# Allegro board ti_foc_motor.brd
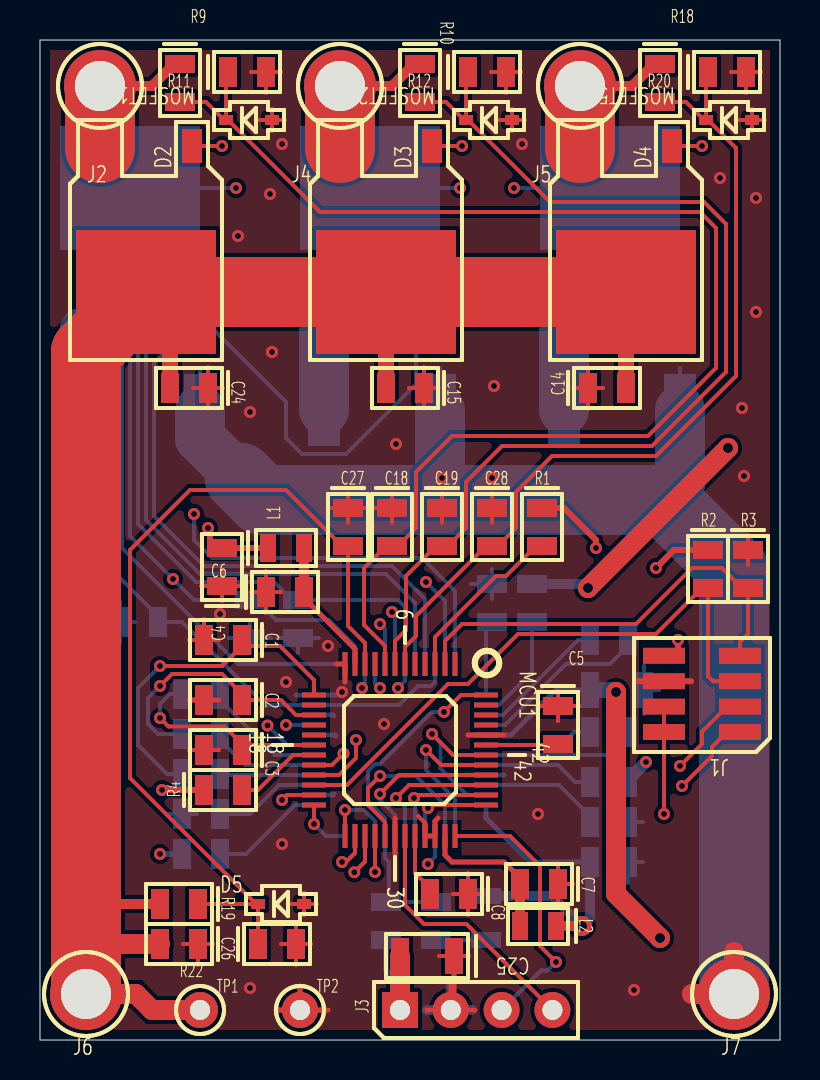
[diagram p0: board, top side]
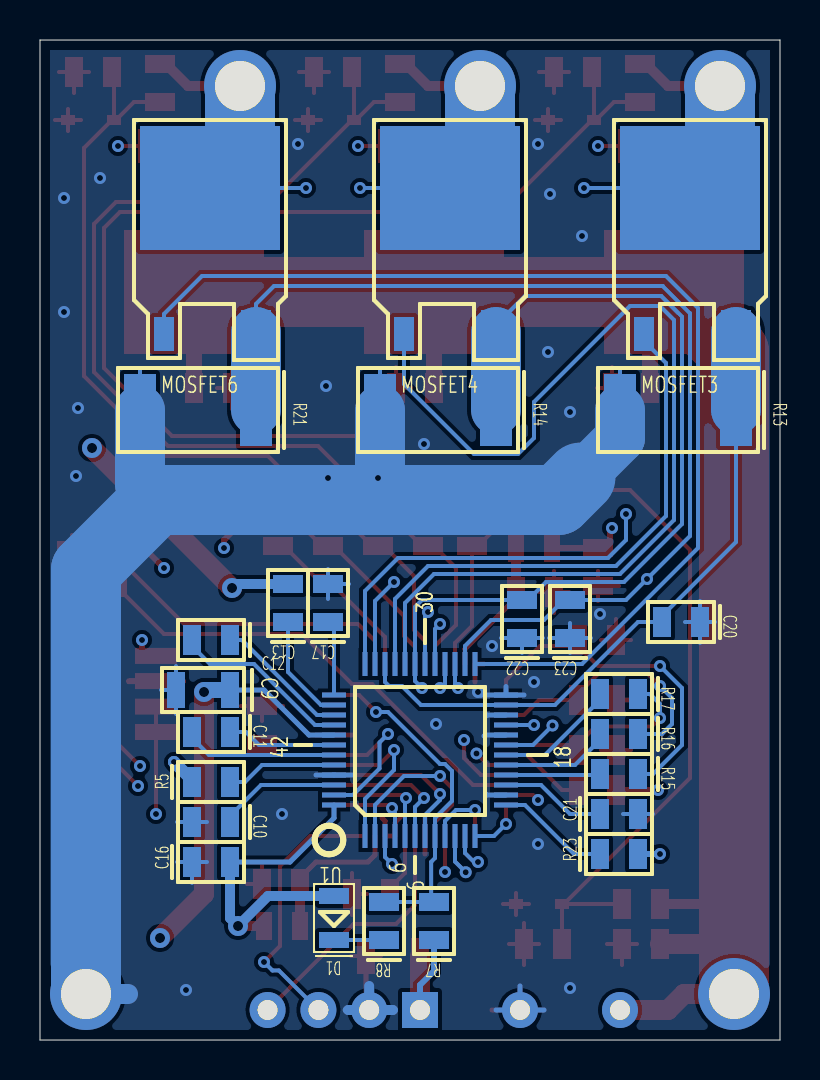
[diagram p1: board, bottom side, seen from below]

Outline 37 x 50 mm; copper layers: TOP, POWER, GND, BOTTOM. Coordinates in mm from the lower left corner of the outline.
Outline path: 0,50 0,0 37,0 37,50 0,50

## Design rules (mm)
constraint set DEFAULT: 

## Placement (name value [footprint] x y rotation side)
C1  2.2nF  [SMD_C_0805]  10.1 20 270 top
C2  2.2nF  [SMD_C_0805]  10.1 17 270 top
C3  2.2nF  [SMD_C_0805]  10.1 14.5 270 top
C4  2.2uF  [SMD_C_0805]  9.1 22.7 180 top
C5  2.2uF  [SMD_C_0805]  25.9 16.7 0 top
C6  2.2uF  [SMD_C_0805]  11.3 22.4 90 top
C7  2.2uF  [SMD_C_0805]  25.9 7.8 270 top
C8  2.2uF  [SMD_C_0805]  21.4 7.3 270 top
C9  4.7uF  [SMD_C_1206]  27.5 17.5 270 bottom
C10  1uF  [SMD_C_0805]  27.5 10.9 270 bottom
C11  47nF  [SMD_C_0805]  27.5 15.4 270 bottom
C12  47nF  [SMD_C_0805]  27.5 20 270 bottom
C13  2.2uF  [SMD_C_0805]  24.6 20.9 0 bottom
C14  1uF  [SMD_C_0805]  27.4 32.6 90 top
C15  1uF  [SMD_C_0805]  19.2 32.6 270 top
C16  1uF  [SMD_C_0805]  29.4 8.9 90 bottom
C17  1uF  [SMD_C_0805]  22.6 20.9 0 bottom
C18  0.1uF  [SMD_C_0805]  17.6 26.6 0 top
C19  0.1uF  [SMD_C_0805]  20.1 26.6 0 top
C20  1nF  [SMD_C_0805]  4 20.9 270 bottom
C21  1uF  [SMD_C_0805]  9 11.3 90 bottom
C22  1nF  [SMD_C_0805]  12.9 20.1 0 bottom
C23  1nF  [SMD_C_0805]  10.5 20.1 0 bottom
C24  1uF  [SMD_C_0805]  8.4 32.6 270 top
C25  47uF  [SMD_C_1206]  20.7 4.2 270 top
C26  0.1uF  [SMD_C_0805]  7.9 4.8 270 top
C27  0.1uF  [SMD_C_0805]  15.4 26.6 0 top
C28  0.1uF  [SMD_C_0805]  22.6 26.6 0 top
D1  RED  [SMD_D_0805]  22.3 5.1 0 bottom
D2  3.3V  [SOD323]  9.3 46 90 top
D3  3.3V  [SOD323]  21.3 46 90 top
D4  3.3V  [SOD323]  33.3 46 90 top
D5  3.3V  [SOD323]  10.9 6.8 90 top
J1  JTAG  [C2X4_SMD_1P27]  35 15.4 180 top
J2  motor_A  [BANANA_SMALL]  3 47.7 0 top
J3  Conn1X4  [CONN1X4]  18 1.5 90 top
J4  motor_B  [BANANA_SMALL]  15 47.7 0 top
J5  motor_C  [BANANA_SMALL]  27 47.7 0 top
J6  power_P  [BANANA_SMALL]  2.3 2.3 0 top
J7  power_GND  [BANANA_SMALL]  34.7 2.3 0 top
L1  bead  [SMD_L_0805]  11.4 24.6 90 top
L2  bead  [SMD_L_0805]  25.8 5.7 270 top
MCU1  TMS320F28027  [LQFP48_MCU]  18 14.5 270 top
MOSFET1  IRLR7843-TO252AA  [TO252AA_ZK]  5.3 37 180 top
MOSFET2  IRLR7843-TO252AA  [TO252AA_ZK]  17.3 37 180 top
MOSFET3  IRLR7843-TO252AA  [TO252AA_ZK]  4.5 43 180 bottom
MOSFET4  IRLR7843-TO252AA  [TO252AA_ZK]  16.5 43 180 bottom
MOSFET5  IRLR7843-TO252AA  [TO252AA_ZK]  29.3 37 180 top
MOSFET6  IRLR7843-TO252AA  [TO252AA_ZK]  28.5 43 180 bottom
R1  2.2K  [SMD_R_0805]  25.1 26.6 0 top
R2  1K  [SMD_R_0805]  33.4 24.5 0 top
R3  2.2K  [SMD_R_0805]  35.4 24.5 0 top
R4  1K  [SMD_R_0805]  8.2 12.5 90 top
R5  100R  [SMD_R_0805]  29.4 12.9 90 bottom
R7  10K  [SMD_R_0805]  17.3 5 0 bottom
R8  330R  [SMD_R_0805]  19.8 5 0 bottom
R9  62K  [SMD_R_0805]  7 48.8 0 top
R10  62K  [SMD_R_0805]  19 48.8 0 top
R11  5K  [SMD_R_0805]  9.4 48.4 90 top
R12  5K  [SMD_R_0805]  21.4 48.4 90 top
R13  0.007R  [SMD_R_2512]  2.2 31.5 270 bottom
R14  0.007R  [SMD_R_2512]  14.2 31.5 270 bottom
R15  56R  [SMD_R_0805]  7.1 13.3 270 bottom
R16  56R  [SMD_R_0805]  7.1 15.3 270 bottom
R17  56R  [SMD_R_0805]  7.1 17.3 270 bottom
R18  62K  [SMD_R_0805]  31 48.8 0 top
R19  62K  [SMD_R_0805]  7.9 6.8 270 top
R20  5K  [SMD_R_0805]  33.4 48.4 90 top
R21  0.007R  [SMD_R_2512]  26.2 31.5 270 bottom
R22  5K  [SMD_R_0805]  10.9 4.8 90 top
R23  10K  [SMD_R_0805]  9 9.3 90 bottom
TP1  CAP_P  [TESTPAD_CIR_10]  8 1.5 0 top
TP2  CAP_N  [TESTPAD_CIR_10]  13 1.5 0 top
U1  DRV8305N  [HTQFP48]  18 14.5 90 bottom

## Library data of the parts
C1-C28 = CAP NP
D1 = LED
D2-D5 = DIODE TVS
J1 = C2X4
J2 J4-J7 = Banana
J3 = C1X4Gen
L1 L2 = INDUCTOR
MCU1 = TMS320F28027PT
MOSFET1-MOSFET6 = N_MOSFET_TO252-263
R1-R5 R7-R23 = RESISTOR
TP1 TP2 = TestPad
U1 = DRV8305_0

## Footprints (pads in the part's own frame, mm; a bottom-side part is the same pattern mirrored in y, then rotated)
BANANA_SMALL
  round 3.6 hole 2.5: 1(0,0)
C2X4_SMD_1P27
  rect 2.1x0.8 smd: 1(0,0) 2(0,-1.27) 3(0,-2.54) 4(0,-3.81) 5(3.8,-3.81) 6(3.8,-2.54) 7(3.8,-1.27) 8(3.8,0)
CONN1X4
  rect 1.8x1.8 hole 1: 1(0,0)
  round 1.8 hole 1: 2(0,-2.54) 3(0,-5.08) 4(0,-7.62)
HTQFP48
  rect 1.2x0.25 smd: 1(-4.3,2.75) 2(-4.3,2.25) 3(-4.3,1.75) 4(-4.3,1.25) 5(-4.3,0.75) 6(-4.3,0.25) 7(-4.3,-0.25) 8(-4.3,-0.75) 9(-4.3,-1.25) 10(-4.3,-1.75) 11(-4.3,-2.25) 12(-4.3,-2.75) 25(4.3,-2.75) 26(4.3,-2.25) 27(4.3,-1.75) 28(4.3,-1.25) 29(4.3,-0.75) 30(4.3,-0.25) 31(4.3,0.25) 32(4.3,0.75) 33(4.3,1.25) 34(4.3,1.75) 35(4.3,2.25) 36(4.3,2.75)
  rect 0.25x1.2 smd: 13(-2.75,-4.3) 14(-2.25,-4.3) 15(-1.75,-4.3) 16(-1.25,-4.3) 17(-0.75,-4.3) 18(-0.25,-4.3) 19(0.25,-4.3) 20(0.75,-4.3) 21(1.25,-4.3) 22(1.75,-4.3) 23(2.25,-4.3) 24(2.75,-4.3) 37(2.75,4.3) 38(2.25,4.3) 39(1.75,4.3) 40(1.25,4.3) 41(0.75,4.3) 42(0.25,4.3) 43(-0.25,4.3) 44(-0.75,4.3) 45(-1.25,4.3) 46(-1.75,4.3) 47(-2.25,4.3) 48(-2.75,4.3)
LQFP48_MCU
  rect 1.2x0.25 smd: 1(-4.3,2.75) 2(-4.3,2.25) 3(-4.3,1.75) 4(-4.3,1.25) 5(-4.3,0.75) 6(-4.3,0.25) 7(-4.3,-0.25) 8(-4.3,-0.75) 9(-4.3,-1.25) 10(-4.3,-1.75) 11(-4.3,-2.25) 12(-4.3,-2.75) 25(4.3,-2.75) 26(4.3,-2.25) 27(4.3,-1.75) 28(4.3,-1.25) 29(4.3,-0.75) 30(4.3,-0.25) 31(4.3,0.25) 32(4.3,0.75) 33(4.3,1.25) 34(4.3,1.75) 35(4.3,2.25) 36(4.3,2.75)
  rect 0.25x1.2 smd: 13(-2.75,-4.3) 14(-2.25,-4.3) 15(-1.75,-4.3) 16(-1.25,-4.3) 17(-0.75,-4.3) 18(-0.25,-4.3) 19(0.25,-4.3) 20(0.75,-4.3) 21(1.25,-4.3) 22(1.75,-4.3) 23(2.25,-4.3) 24(2.75,-4.3) 37(2.75,4.3) 38(2.25,4.3) 39(1.75,4.3) 40(1.25,4.3) 41(0.75,4.3) 42(0.25,4.3) 43(-0.25,4.3) 44(-0.75,4.3) 45(-1.25,4.3) 46(-1.75,4.3) 47(-2.25,4.3) 48(-2.75,4.3)
SMD_C_0805
  rect 1.5x0.9 smd: 1(0,0) 2(0,-1.9)
SMD_C_1206
  rect 1.8x0.9 smd: 1(0,0) 2(0,-2.7)
SMD_D_0805
  rect 1.5x0.8 smd: 1(0,0.1) 2(0,-2.1)
SMD_L_0805
  rect 1.4x0.8 smd: 1(0,0) 2(0,-1.8)
SMD_R_0805
  rect 1.5x0.9 smd: 1(0,0) 2(0,-1.9)
SMD_R_2512
  rect 3.6x1.6 smd: 1(0,0) 2(0,-5.8)
SOD323
  rect 0.5x0.7 smd: 1(0,0) 2(0,-2.3)
TESTPAD_CIR_10
  round 1.8 hole 1: 1(0,0)
TO252AA_ZK
  rect 1x1.7 smd: 1(-2.3,-7.7)
  rect 1.5x2.2 smd: 3(2.3,-7.6)
  rect 7x6.2 smd: 4(0,-0.4)

## Nets
3.3V: C4.2 C16.2 C25.2 D1.2 J1.5 J3.1 L1.1 L2.1 R1.1 R2.1 R4.1 R7.1 R23.2 U1.48
GND: C1.2 C2.2 C3.2 C4.1 C5.1 C6.1 C7.1 C8.1 C9.2 C10.2 C14.1 C15.1 C16.1 C17.2 C18.1 C19.1 C20.1 C21.2 C22.1 C23.1 C24.1 C25.1 C26.1 C27.1 C28.1 D2.2 D3.2 D4.2 D5.2 J1.6 J3.2 J7.1 MCU1.12 MCU1.30 MCU1.33 MCU1.34 MCU1.44 R3.1 R11.2 R12.2 R13.2 R14.2 R20.2 R21.2 R22.2 TP2.1(T) U1.14 U1.20 U1.22 U1.24 U1.45
PVDD: C9.1 C13.2 C14.2 C15.2 C24.2 C26.2 J6.1 MOSFET1.4 MOSFET2.4 MOSFET5.4 R5.1 R19.2 TP1.1(T) U1.41
GH_A: MOSFET1.1 U1.36
GH_B: MOSFET2.1 U1.29
GH_C: MOSFET5.1 U1.28
GL_A: MOSFET3.1 U1.33
GL_B: MOSFET4.1 U1.32
GL_C: MOSFET6.1 U1.25
MCU_EN_GATE: MCU1.41 U1.1
MCU_IIC_SCK: J3.3 MCU1.36
MCU_IIC_SDA: J3.4 MCU1.31
MCU_INH_A: MCU1.29 U1.2
MCU_INH_B: MCU1.37 U1.4
MCU_INH_C: MCU1.39 U1.6
MCU_INL_A: MCU1.28 U1.3
MCU_INL_B: MCU1.38 U1.5
MCU_INL_C: MCU1.40 U1.7
MCU_ISEN_A: C1.1 MCU1.13 R15.1
MCU_ISEN_B: C2.1 MCU1.15 R16.1
MCU_ISEN_C: C3.1 MCU1.18 R17.1
MCU_NFAULT: MCU1.48 R7.2 R8.2 U1.8
MCU_SPI_CS: MCU1.25 U1.9
MCU_SPI_MISO: MCU1.26 U1.11
MCU_SPI_MOSI: MCU1.27 U1.10
MCU_SPI_SCK: MCU1.24 U1.12
MCU_VSEN_A: C18.2 D2.1(CATHODE) MCU1.8 R9.2 R11.1
MCU_VSEN_B: C19.2 D3.1(CATHODE) MCU1.7 R10.2 R12.1
MCU_VSEN_C: C28.2 D4.1(CATHODE) MCU1.6 R18.2 R20.1
MCU_VSEN_PVDD: C27.2 D5.1(CATHODE) MCU1.10 R19.1 R22.1
MCU_WAKE: MCU1.42 U1.47(WAKE)
SH_A: J2.1 MOSFET1.3(S) MOSFET3.4 R9.1 U1.35
SH_B: J4.1 MOSFET2.3(S) MOSFET4.4 R10.1 U1.30
SH_C: J5.1 MOSFET5.3(S) MOSFET6.4 R18.1 U1.27
SL_A: C20.2 MOSFET3.3(S) R13.1 U1.23 U1.34
SL_B: C22.2 MOSFET4.3(S) R14.1 U1.21 U1.31
SL_C: C23.2 MOSFET6.3(S) R21.1 U1.19 U1.26
TCK: J1.7 J1.8 MCU1.23
TDI: J1.1 MCU1.20
TDO: J1.3 MCU1.22 R2.2
TMS: J1.2 MCU1.21
TRST: J1.4 MCU1.2 R3.2
N01800: D1.1(CATHODE) R8.1
N02208: C21.1 U1.15
N02325: R15.2 U1.16
N02329: R16.2 U1.17
N02333: R17.2 U1.18
N03801: C17.1 U1.37
N03912: C13.1 U1.38
N04769: C11.1 U1.42
N04773: C11.2 U1.43
N04796: C12.1 U1.39
N04800: C12.2 U1.40
N04838: R5.2 U1.44
N04994: C10.1 U1.46
N3758007: C6.2 L1.2 MCU1.11
N3759669: C7.2 L2.2 MCU1.35
N3759821: C5.2 MCU1.43
N3759959: C8.2 MCU1.32
N3828127: MCU1.19 R4.2
N3830827: MCU1.3(X\R\S\) R1.2
N3830915: R23.1 U1.13

Pads without a net: MCU1 1 4 5 9 14 16 17 45 46 47

## Via types
v1: diameter 0.6, hole 0.3, TOP to BOTTOM, 71 vias
v2: diameter 1, hole 0.5, TOP to BOTTOM, 5 vias

## Routing (per net, layer and track width the routed paths; a pad name or vN(x,y) marks a point on that pad's centre or on a via; arc(x,y) is an arc through that point)
3.3V: length 42
  TOP w0.3: R1.1 26.2,26.6 27.8,25 v1(27.8,24.6) ; J1.5 31.6,19.21 31.9,19.51 v1(31.9,20) ; R4.1 v1(6.1,12.5) ; R2.1 31.7,24.5 v1(30.8,23.6) ; L1.1 C4.2 8.8,24.6 8.5,24.9 8.5,25.5 v1(8.4,25.6)
  TOP w0.5: L2.1 v2(27.1,5.7)
  TOP w1: C25.2 J3.1
  POWER w0.2: 19.19,1.5 19.2,1.5
  POWER w0.5: J3.1 16.8,1.5 ; J3.1 19.19,1.5 ; J3.1 18,2.7
  BOTTOM w0.25: U1.48 22.3,11.1 24.5,8.9 C16.2
  BOTTOM w0.3: R23.2 v1(6,9.3) ; J3.1 18,2.75 17.3,3.45 R7.1
  BOTTOM w0.5: C16.2 27.5,6.1 v2(27.1,5.7) 25.6,7.2 D1.2
GND: length 217.7
  TOP w0.2: C4.1 9.1,23.45 ; C4.1 9.1,21.95 ; C4.1 8.05,22.7 ; C4.1 10.15,22.7 ; 35.4,23.75 R3.1 35.4,25.25 ; 25.9,15.95 C5.1 ; C5.1 26.95,16.7 ; C5.1 25.9,17.45 ; C5.1 24.85,16.7 ; D2.2 12.25,46 ; D2.2 11.6,45.45 ; D2.2 11.6,46.55 ; D2.2 10.95,46 ; R11.2 12.05,48.4 ; R11.2 11.3,47.35 ; R11.2 10.55,48.4 ; 8.95,14.5 C3.2 7.45,14.5 ; 22.95,46 D3.2 ; D3.2 23.6,46.55 ; D3.2 24.25,46 ; D3.2 23.6,45.45 ; 27.4,31.55 C14.1 ; C14.1 28.15,32.6 ; C14.1 26.65,32.6 ; C14.1 27.4,33.65 ; C15.1 19.95,32.6 ; C15.1 19.2,31.55 ; C15.1 18.45,32.6 ; C15.1 19.2,33.65 ; 12.05,4.8 R22.2 ; R22.2 12.8,5.85 ; R22.2 13.55,4.8 ; R22.2 12.8,3.75 ; 7.15,4.8 C26.1 ; C26.1 7.9,3.75 ; C26.1 8.65,4.8 ; R20.2 36.05,48.4 ; R20.2 34.55,48.4 ; R20.2 35.3,47.35 ; C27.1 15.4,27.35 ; C27.1 14.35,26.6 ; C27.1 15.4,25.85 ; C27.1 16.45,26.6 ; D4.2 35.6,46.55 ; D4.2 35.6,45.45 ; D4.2 36.25,46 ; D4.2 34.95,46 ; C6.1 12.05,22.4 ; C6.1 10.55,22.4 ; C6.1 11.3,21.35 ; C6.1 11.3,23.45 ; 23.3,47.35 R12.2 ; R12.2 24.05,48.4 ; R12.2 22.55,48.4 ; 8.4,31.55 C24.1 ; C24.1 7.65,32.6 ; C24.1 8.4,33.65 ; C24.1 9.15,32.6 ; 16.55,26.6 C18.1 ; C18.1 17.6,27.35 ; C18.1 17.6,25.85 ; 20.1,25.85 C19.1 20.1,27.35 ; 18.9,11.2 19.25,10.85 ; D5.2 13.2,7.35 ; D5.2 13.85,6.8 ; D5.2 12.55,6.8 ; D5.2 13.2,6.25 ; C8.1 21.4,8.35 ; C8.1 21.4,6.25 ; C8.1 22.15,7.3 ; C8.1 20.65,7.3 ; C1.2 8.2,21.05 ; C1.2 8.95,20 ; C1.2 7.45,20 ; 21.45,4.2 C25.1 19.95,4.2 ; 22.6,25.85 C28.1 22.6,27.35 ; 25.9,6.75 C7.1 ; C7.1 26.65,7.8 ; C7.1 25.9,8.85
  TOP w0.25: 15.25,17.9 MCU1.12 14.82,18.8 ; 19.9,11.1 19.75,10.95 MCU1.34 MCU1.33 19.25,10.85 ; C25.1 20.7,1.66 J3.2 ; 21.4,15.25 MCU1.44 23.2,15.25 ; TP2.1 13,2.7 ; TP2.1 14.4,1.5 ; TP2.1 11.8,1.5 ; 17.75,11.1 MCU1.30 17.75,9.3 ; 7.45,17 C2.2 8.95,17 ; J3.2 19.35,1.5 ; J3.2 21.74,1.5 ; J3.2 20.54,2.7
  TOP w0.3: 32.55,17.94 J1.6 29.85,17.94
  TOP w1: 32.6,2.3 J7.1 34.7,4.4
  GND w0.25: 14.3,1.5 TP2.1 ; J3.2 19.34,1.5 ; J3.2 21.74,1.5 ; J3.2 20.54,2.7 ; TP2.1 13,2.7 ; TP2.1 11.8,1.5
  GND w1: 34.7,4.4 J7.1 32.5,2.3
  BOTTOM w0.2: 22.6,22.05 C17.2 ; C17.2 21.55,22.8 ; C17.2 22.6,23.55 ; 30.15,10.9 C10.2 28.65,10.9 ; C20.1 4,21.95 ; C20.1 4,19.85 ; C20.1 4.75,20.9 ; C20.1 3.25,20.9 ; 7.85,11.3 C21.2 6.35,11.3 ; 9.45,20.1 C23.1 ; C23.1 10.5,19.35 ; C23.1 11.55,20.1 ; C23.1 10.5,20.85 ; 6.9,31.5 R13.2 ; R13.2 8,33.6 ; R13.2 9.1,31.5 ; 28.65,8.9 C16.1 ; C16.1 29.4,7.85 ; C16.1 30.15,8.9 ; R14.2 21.1,31.5 ; R14.2 20,33.6 ; R14.2 18.9,31.5 ; C9.2 30.95,17.5 ; C9.2 30.2,16.3 ; C9.2 30.2,18.7 ; 11.85,20.1 C22.1 ; C22.1 12.9,19.35 ; C22.1 13.95,20.1 ; 30.9,31.5 R21.2 ; R21.2 33.1,31.5 ; R21.2 32,33.6
  BOTTOM w0.25: U1.20 14.75,15.25 14.8,15.2 ; U1.14 14.65,12.25 14.7,12.3 ; U1.24 12.8,17.25 ; U1.24 14.95,17.25 v1(15.1,17.4) ; U1.24 13.7,17.68 ; TP2.1 14.2,1.5 ; TP2.1 11.8,1.5 ; TP2.1 13,2.7 ; 14.7,16.2 14.65,16.25 U1.22 ; 21.74,1.5 21.6,1.5 ; 21.4,13.25 U1.45 23.2,13.25
  BOTTOM w0.5: 21.6,1.5 J3.2 ; J3.2 19.35,1.5 ; J3.2 20.54,2.7
  BOTTOM w1: J7.1 32.6,2.3
  BOTTOM w2.5: 31.2,27 32,27.8 R21.2 ; 20,27 R14.2 ; R13.2 8,30.1 9.8,28.3
  BOTTOM w3.5: J7.1 34.7,23.5 31.2,27 11.1,27 9.98,28.12
  vias: v1(9,21.3) v1(9.9,40.2) v1(10.5,31.4) v1(10.5,2.6) v1(11.5,42.3) v1(11.6,34.4) v1(12.1,44.8) v1(12.1,9.8) v1(12.3,17.9) v1(14.4,19.7) v1(17.2,15.8) v1(17.8,29.8) v1(20.1,28.1) v1(22.6,28.1) v1(22.7,32.7) v1(24.1,44.8) v1(24.9,11.3) v1(29.7,2.5) v1(34,43.1) v1(35.1,31.6) v1(35.2,28.2) v1(35.8,42.1) v1(35.8,36.4)
PVDD: length 130.1
  TOP w0.5: R19.2 2.3,6.8
  TOP w0.8: MOSFET1.4 6.5,36.2 C24.2 ; C15.2 MOSFET2.4 ; C14.2 MOSFET5.4
  TOP w1: v2(28.8,17.4) 28.8,7.3 v2(31,5.1) ; J6.1 4.8,2.3 5.6,1.5 TP1.1 ; C26.2 2.3,4.8 ; v2(27.4,22.6) v2(34.4,29.6)
  TOP w3.5: J6.1 2.3,34.4 MOSFET1.4 MOSFET2.4 MOSFET5.4
  POWER w0.2: 4.4,2.3 J6.1 2.3,4.4
  POWER w0.5: 9.2,1.5 TP1.1 8,2.7
  BOTTOM w0.25: U1.41 23.55,15.25 25.8,17.5 C9.1
  BOTTOM w0.5: v2(27.4,22.6) 27.2,22.8 C13.2
  BOTTOM w0.6: v1(30.3,13.9) 29.4,13 R5.1
  BOTTOM w0.8: C9.1 28.7,17.5 v2(28.8,17.4)
GH_A: length 39.5
  TOP w0.2: v1(9.1,44.7) MOSFET1.1
  POWER w0.2: v1(7.7,26.3) 7.7,43.3 v1(9.1,44.7)
  BOTTOM w0.2: v1(7.7,26.3) 7.7,25 8.6,24.1 19.1,24.1 20.75,22.45 U1.36
GH_B: length 30.7
  TOP w0.2: v1(21.1,44.7) MOSFET2.1
  POWER w0.2: v1(21.1,44.7) 21.7,44.1 21.7,23.8 18.7,20.8 v1(17,20.8)
  BOTTOM w0.2: v1(17,20.8) 17.25,20.55 U1.29
GH_C: length 36.6
  TOP w0.2: v1(33.1,44.7) MOSFET5.1
  POWER w0.2: v1(33.1,44.7) 33.1,33.7 v1(17,17.6)
  BOTTOM w0.2: v1(17,17.6) 16.95,17.6 16.75,17.8 U1.28
GL_A: length 28.1
  BOTTOM w0.2: U1.33 19.25,22.05 17.6,23.7 8.2,23.7 5.7,26.2 5.7,33.85 6.8,34.95 MOSFET3.1
GL_B: length 50.1
  BOTTOM w0.2: U1.32 18.75,21.85 17.3,23.3 8,23.3 5.3,26 5.3,36 6,36.7 7.5,36.7 12.3,31.9 12.3,30.1 13.1,29.3 15.3,29.3 18.8,32.8 MOSFET4.1
GL_C: length 54.7
  BOTTOM w0.2: U1.25 9.9,18.8 4.1,24.6 4.1,36.6 5.7,38.2 28.9,38.2 30.8,36.3 MOSFET6.1
MCU_EN_GATE: length 8.2
  TOP w0.2: MCU1.41 20.05,13.75 v1(19.3,14.5)
  BOTTOM w0.2: v1(19.3,14.5) 19.3,13.5 20.75,12.05 U1.1
MCU_IIC_SCK: length 13.7
  TOP w0.2: v1(25.8,3.9) 25,4.7 25,8.7 23.5,10.2 MCU1.36
  BOTTOM w0.2: v1(25.8,3.9) 25.38,3.48 25.06,3.48 J3.3
MCU_IIC_SDA: length 13
  TOP w0.2: J3.4 21.32,5.8 19.2,5.8 18.25,6.75 MCU1.31
MCU_INH_A: length 9
  TOP w0.2: MCU1.29 17.25,10.9 16.4,11.75 16.4,12.6 v1(17,13.2)
  BOTTOM w0.2: v1(17,13.2) 18.8,13.2 20.25,11.75 U1.2
MCU_INH_B: length 4.4
  TOP w0.2: MCU1.37 19.65,11.75 19.5,11.6 v1(19.4,11.6)
  BOTTOM w0.2: U1.4 19.25,11.35 19.4,11.5 v1(19.4,11.6)
MCU_INH_C: length 6.9
  TOP w0.2: MCU1.39 18.45,12.75 v1(17.8,12.1)
  BOTTOM w0.2: v1(17.8,12.1) 18.25,11.65 U1.6
MCU_INL_A: length 6.2
  TOP w0.2: v1(16.75,8.4) MCU1.28
  GND w0.2: v1(16.75,8.4) 19,8.4 v1(19.4,8.8)
  BOTTOM w0.2: U1.3 19.75,9.15 v1(19.4,8.8)
MCU_INL_B: length 5.6
  TOP w0.2: v1(18.7,12.1) 18.85,12.25 MCU1.38
  BOTTOM w0.2: v1(18.7,12.1) 18.75,12.05 U1.5
MCU_INL_C: length 8.1
  TOP w0.2: v1(17,12.3) 17.95,13.25 MCU1.40
  BOTTOM w0.2: U1.7 17.75,11.25 17,12 v1(17,12.3)
MCU_ISEN_A: length 17.1
  TOP w0.2: C1.1 10.1,19.7 ; 10.1,19.7 9.1,18.7 v1(6,18.7) ; 10.1,19.7 12,19.7 13.7,18 MCU1.13
  BOTTOM w0.2: R15.1 6.35,13.3 4.9,14.75 4.9,17.6 v1(6,18.7)
MCU_ISEN_B: length 13
  TOP w0.2: v1(6,17.7) 6.6,18.3 9.1,18.3 10.1,17.3 C2.1 12.05,17 12.8,16.25 MCU1.15
  BOTTOM w0.2: v1(6,17.7) 5.4,17.1 5.4,15.8 5.9,15.3 R16.1
MCU_ISEN_C: length 10.6
  TOP w0.2: MCU1.18 10.35,14.75 C3.1 10.1,14.8 9.22,15.68 6.42,15.68 v1(6,16.1)
  BOTTOM w0.2: R17.1 6.5,17.3 6,16.8 v1(6,16.1)
MCU_NFAULT: length 17
  TOP w0.2: v1(20.2,16.4) 21.05,17.25 MCU1.48
  BOTTOM w0.2: R8.2 R7.2 17.44,7.04 17.44,8.91 17.25,9.1 U1.8 17.25,11.1 16.4,11.95 16.4,13.45 16.75,13.8 17,13.8 19.6,16.4 v1(20.2,16.4)
MCU_SPI_CS: length 3.8
  TOP w0.2: v1(15.25,11.5) MCU1.25
  BOTTOM w0.2: U1.9 16.75,10.95 16.2,11.5 v1(15.25,11.5)
MCU_SPI_MISO: length 3.4
  TOP w0.2: MCU1.26 15.75,9.35 15.3,8.9 v1(15.1,8.9)
  BOTTOM w0.2: MCU1.26 15.75,9.35 15.3,8.9 v1(15.1,8.9)
MCU_SPI_MOSI: length 4.1
  TOP w0.2: MCU1.27 16.25,8.92 v1(15.71,8.39)
  BOTTOM w0.2: MCU1.27 16.25,8.92 v1(15.71,8.39)
MCU_SPI_SCK: length 2.7
  TOP w0.2: v1(13.7,10.8) MCU1.24
  BOTTOM w0.2: U1.12 14.3,10.2 v1(13.7,10.8)
MCU_VSEN_A: length 67.5
  TOP w0.2: R9.2 8.3,46.9 9.2,46 D2.1 ; D2.1 9.4,46 14,41.4 33,41.4 33.8,40.6 33.8,33.6 30.4,30.2 20.6,30.2 18.8,28.4 18.8,25.6 17.9,24.7 C18.2 17.3,24.7 16.2,23.6 16.2,20.75 17.25,19.7 MCU1.8 ; D2.1 9.3,48.3 R11.1
MCU_VSEN_B: length 53.9
  TOP w0.2: MCU1.7 17.75,19.95 18.3,20.5 18.3,23.2 19.8,24.7 C19.2 20.4,24.7 21.3,25.6 21.3,27.9 23.1,29.7 30.6,29.7 34.3,33.4 34.3,40.8 33.2,41.9 25.5,41.9 21.4,46 D3.1 ; D3.1 21.3,48.3 R12.1 ; D3.1 21.2,46 20.3,46.9 R10.2
MCU_VSEN_C: length 43.2
  TOP w0.2: R18.2 32.3,46.9 33.2,46 D4.1 ; D4.1 33.3,48.3 R20.1 ; D4.1 33.4,46 34.8,44.6 34.8,33.2 30.8,29.2 25.6,29.2 23.8,27.4 23.8,25.6 22.9,24.7 C28.2 22.3,24.7 18.8,21.2 18.8,20.2 18.25,19.65 MCU1.6
MCU_VSEN_PVDD: length 44.9
  TOP w0.2: 10.8,6.8 R19.1 ; 10.8,6.8 4.5,13.1 4.5,24.5 7.5,27.5 12.3,27.5 15.1,24.7 C27.2 15.4,20.7 16.25,19.85 MCU1.10 ; 10.8,6.8 D5.1 R22.1
MCU_WAKE: length 7.9
  TOP w0.2: v1(19.6,15.3) 20.65,14.25 MCU1.42
  BOTTOM w0.2: U1.47 21.35,12.25 20.02,13.58 20.02,14.88 v1(19.6,15.3)
SH_A: length 46.7
  TOP w0.5: J2.1 5.6,47.7 6.7,48.8 R9.1
  TOP w3.5: J2.1 MOSFET1.3
  POWER w0.2: v1(9.8,42.6) 19.3,33.1 v1(19.3,22.9)
  BOTTOM w0.2: U1.35 20.25,21.95 v1(19.3,22.9) ; MOSFET3.4 v1(9.8,42.6)
  BOTTOM w3.5: MOSFET3.4 3,44.1 J2.1
SH_B: length 43.7
  TOP w0.5: R10.1 18.7,48.8 17.6,47.7 J4.1
  TOP w3.5: J4.1 MOSFET2.3
  POWER w0.2: v1(21,42.6) 21,23.7 18.7,21.4 v1(17.6,21.4)
  BOTTOM w0.2: MOSFET4.4 v1(21,42.6) ; U1.30 17.75,21.18 17.6,21.33 v1(17.6,21.4)
  BOTTOM w3.5: MOSFET4.4 15,44.1 J4.1
SH_C: length 47.5
  TOP w0.5: R18.1 30.7,48.8 29.6,47.7 J5.1
  TOP w3.5: J5.1 MOSFET5.3
  POWER w0.2: v1(16.1,17.6) 23.7,25.2 v1(23.7,42.6)
  BOTTOM w0.2: U1.27 16.25,17.75 v1(16.1,17.6) ; MOSFET6.4 v1(23.7,42.6)
  BOTTOM w3.5: J5.1 27,44.1 MOSFET6.4
SL_A: length 33
  BOTTOM w0.2: U1.34 19.75,17.9 19.55,17.7 18.9,17.7 17.95,16.75 U1.23 11.25,16.75 7.1,20.9 C20.2 5.9,21.2 2.2,24.9 R13.1
  BOTTOM w2.5: R13.1 MOSFET3.3
SL_B: length 52
  POWER w0.2: v1(12.3,15.75) 16.05,15.75 v1(17.9,17.6)
  BOTTOM w0.2: MOSFET4.3 14.2,35.75 12.75,37.2 5.93,37.2 4.9,36.17 4.9,25.8 7.8,22.9 11.7,22.9 12.6,22 C22.2 17.9,22 18.25,21.65 U1.31 18.25,17.95 v1(17.9,17.6) ; v1(12.3,15.75) U1.21
  BOTTOM w2.5: MOSFET4.3 R14.1
SL_C: length 65.6
  POWER w0.2: v1(6.65,23.05) 6.65,20.35 10.85,16.15 10.95,16.15 v1(11.38,15.72)
  BOTTOM w0.2: MOSFET6.3 26.2,36.8 25.3,37.7 5.87,37.7 4.5,36.33 4.5,25.2 v1(6.65,23.05) 7.7,22 C23.2 10.8,22 11.8,21 14.45,21 15.75,19.7 U1.26 ; v1(11.38,15.72) 12.35,14.75 U1.19
  BOTTOM w2.5: R21.1 MOSFET6.3
TCK: length 28.1
  TOP w0.2: v1(31.2,11.3) J1.8 J1.7 ; v1(12.1,12) 12.35,12.25 MCU1.23
  POWER w0.2: v1(12.1,12) 12.1,11.1 13.2,10 29.9,10 v1(31.2,11.3)
TDI: length 23.6
  TOP w0.2: J1.1 34.35,15.4 33.6,14.65 33.6,14.2 v1(32.1,12.7) ; v1(15.18,14.32) 14.6,13.75 MCU1.20
  POWER w0.2: v1(15.18,14.32) 17.88,14.32 19.5,12.7 v1(32.1,12.7)
TDO: length 29.9
  TOP w0.2: J1.3 33.65,17.94 33.4,18.19 R2.2 33.1,22.6 30.8,20.3 23.9,20.3 21.4,17.8 20.4,17.8 15.35,12.75 MCU1.22
TMS: length 25.2
  TOP w0.2: v1(32,13.7) 33.1,14.8 33.1,15.42 34.35,16.67 J1.2 ; v1(15.8,15) 15.8,14.1 14.95,13.25 MCU1.21
  POWER w0.2: v1(32,13.7) 31.4,13.1 19.7,13.1 17.8,15 v1(15.8,15)
TRST: length 21.8
  TOP w0.2: J1.4 35,19.91 35.4,20.31 R3.2 35.1,22.6 34.1,23.6 32.6,23.6 29.8,20.8 21.1,20.8 20.25,19.95 MCU1.2
N01800: length 2.5
  BOTTOM w0.2: R8.1 D1.1
N02208: length 5.3
  BOTTOM w0.2: U1.15 11.95,12.75 10.5,11.3 C21.1
N02325: length 4.7
  BOTTOM w0.2: R15.2 9.05,13.25 U1.16
N02329: length 5.5
  BOTTOM w0.2: U1.17 10.25,13.75 9,15 R16.2
N02333: length 6.1
  BOTTOM w0.2: R17.2 9,17 11.75,14.25 U1.18
N03801: length 3.8
  BOTTOM w0.2: U1.37 22.3,20.7 22.5,20.9 C17.1
N03912: length 5.5
  BOTTOM w0.2: C13.1 24.6,18.4 22.95,16.75 U1.38
N04769: length 5.5
  BOTTOM w0.2: U1.42 26.05,14.75 26.7,15.4 C11.1
N04773: length 7.8
  BOTTOM w0.2: C11.2 29.4,15.1 28.55,14.25 U1.43
N04796: length 6.8
  BOTTOM w0.2: C12.1 26.9,20 23.15,16.25 U1.39
N04800: length 9
  BOTTOM w0.2: U1.40 23.25,15.75 26.3,18.8 28.5,18.8 29.4,19.7 C12.2
N04838: length 5.6
  BOTTOM w0.2: R5.2 26.75,12.9 25.9,13.75 U1.44
N04994: length 6.1
  BOTTOM w0.2: C10.1 27.5,11.2 25.95,12.75 U1.46
N3758007: length 6.9
  TOP w0.25: C6.2 13.2,22.1 15.75,19.55 MCU1.11
  TOP w0.5: L1.2 C6.2
N3759669: length 7.6
  TOP w0.25: MCU1.35 20.25,9.25 20.6,8.9 23.2,8.9 24,8.1 C7.2
  TOP w0.5: L2.2 C7.2
N3759821: length 3.6
  TOP w0.2: MCU1.43 25.85,14.75 C5.2
N3759959: length 3.2
  TOP w0.2: MCU1.32 18.75,8.35 19.5,7.6 C8.2
N3828127: length 4.3
  TOP w0.2: R4.2 10.9,12.5 12.65,14.25 MCU1.19
N3830827: length 8.6
  TOP w0.2: R1.2 24.8,24.7 23.3,23.2 22.8,23.2 19.75,20.15 MCU1.3
N3830915: length 5.7
  BOTTOM w0.2: R23.1 10.3,9.3 12.75,11.75 U1.13

## Copper pours and planes (outline as drawn; the poured copper is in the pictures)
3.3V on POWER: 16.6,0.6 15.3,1.9 15.3,3.9 11.9,7.3 6.9,7.3 4.5,9.7 4.5,23.3 8.1,26.9 11.9,26.9 13.3,25.5 13.3,19.2 10.2,16.1 10.2,10.5 11.8,8.9 25.5,8.9 26.7,10.1 30.3,10.1 32.3,12.1 32.3,16.5 30.3,18.5 30.3,21.4 27.2,24.5 24.5,24.5 22.9,26.1 22.9,28.1 23.4,28.6 32.6,28.6 32.6,28.5 34.8,26.3 34.8,10.7 28,3.9 20.6,3.9 19.7,3 19.7,1 19.3,0.6
GND on TOP, BOTTOM, GND: 0.5,0.5 0.5,49.5 36.5,49.5 36.5,0.5
PVDD on POWER: 0.5,0.5 0.5,49.5 36.5,49.5 36.5,0.5

## Text on the board
PLACE_BOUND_TOP: FIGURE | SIZE | 0.3 | 0.5 | 1.0 | 6.0 | DRILL CHART: TOP to BOTTOM | ALL UNITS ARE IN MILLIMETERS | PLATED | QTY | 144 | 9 | 12 | 5
